# Altium PCB Display_Control_UV.PcbDoc
Units mil, origin at the board's own origin, x right, y up, seen from the top; angles counter-clockwise.
Board outline 2283.46 x 1259.84 mil, 2 copper layers (Top Layer, Bottom Layer); 16 components, 31 nets, 93 pads, 20 vias.
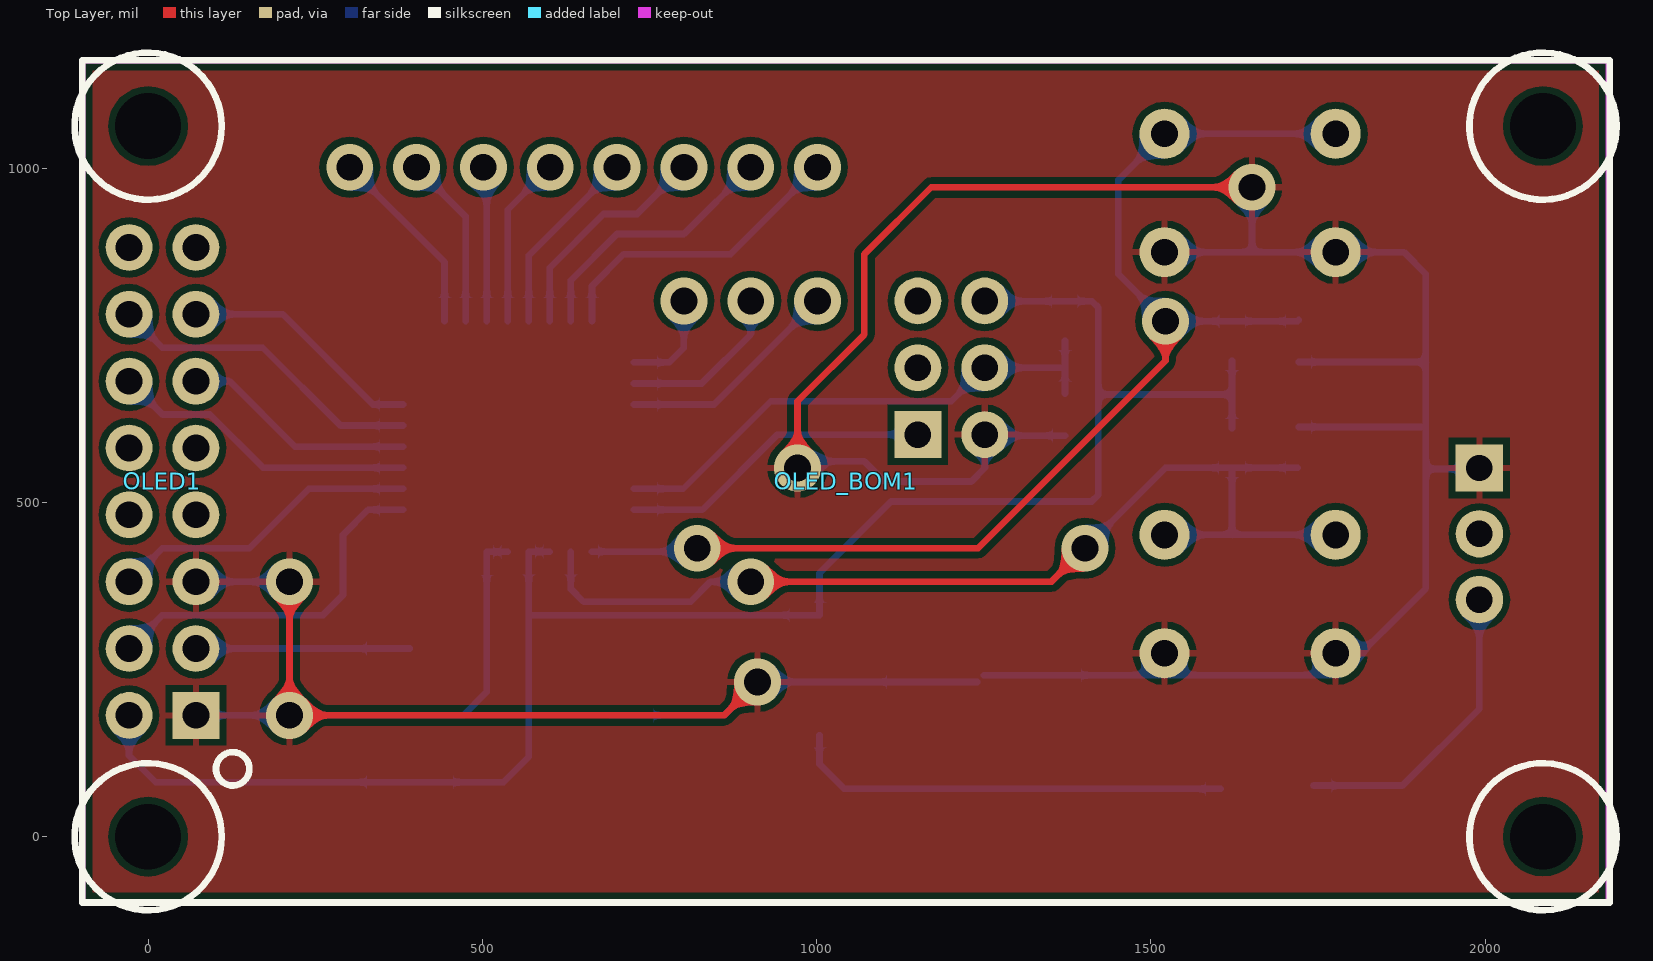
[diagram p0: Top Layer view]
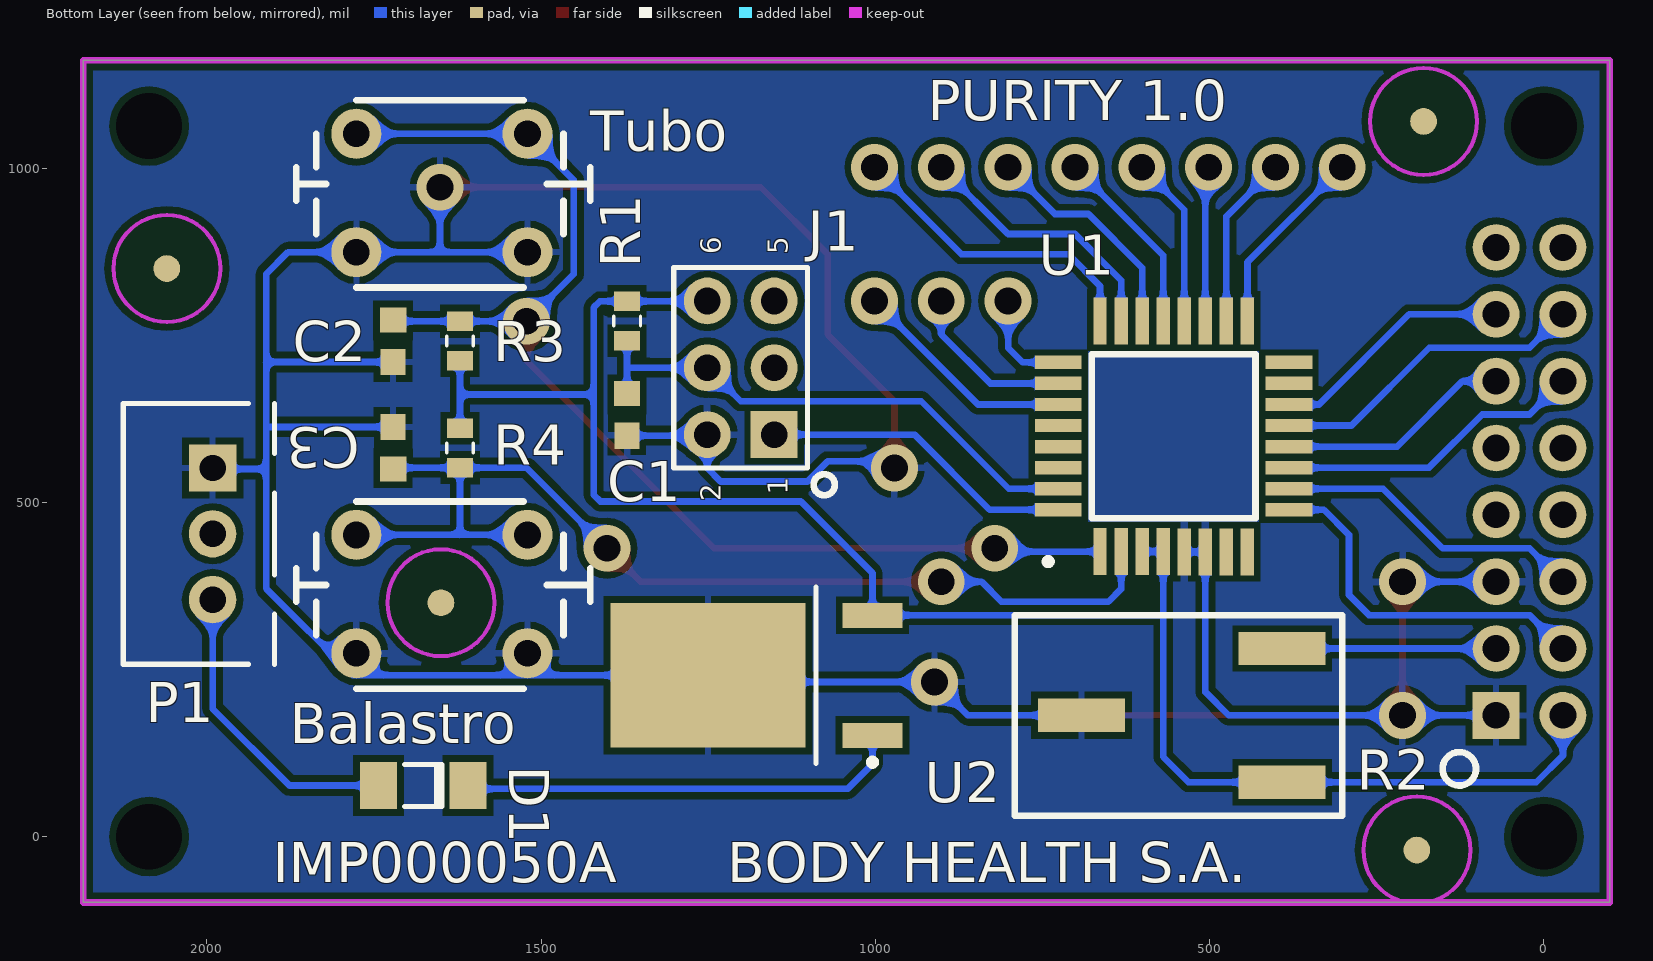
[diagram p1: Bottom Layer view, seen from below]

## Layer stack, top to bottom
Top Solder: solder mask 0.4, Solder Resist, Dk 3.5
Top Layer: signal copper 1.4
Dielectric 1: dielectric 12.6, FR-4, Dk 4.8
Bottom Layer: signal copper 1.4
Bottom Solder: solder mask 0.4, Solder Resist, Dk 3.5

## Board outline
-98.43,-98.43 2185.04,-98.43 2185.04,1161.42 -98.43,1161.42

## Design rules (kind name [scope] priority, off if disabled: settings)
Clearance [All] p1: gap=10 ignorepadtopadclearanceinfootprint=FALSE except(0: Arc-Hole Track-Hole SMDPad-Hole THPad-Hole Via-Hole Fill-Hole Poly-Hole Region-Hole Text-Hole)
MinimumSolderMaskSliver [All] p1: minsoldermaskwidth=3
PolygonConnect [All] p1: connectstyle=Relief reliefconductorwidth=10 reliefentries=4 polygonreliefangle="90 Angle" airgapwidth=10
RoomDefinition Display_Control_UV [InComponentClass('Display_Control_UV')] p1: confinementstyle=ConfineIn formatcopy=TRUE lockcomponents=FALSE outline -2098.5,-3098.5 -98.5,-3098.5 -98.5,-2098.5 -2098.5,-2098.5
RoutingVias [All] p1: holewidth=40 width=70 viastyle="Through Hole" minholewidth=40 minwidth=70 maxholewidth=40 maxwidth=70
SilkToSilkClearance [All] p1: silktosilkclearance=5
SilkToSolderMaskClearance [IsPad] p1: minsilkscreentomaskgap=0 clearancetoexposedcopper=TRUE
SolderMaskExpansion [All] p1: expansion=4 istentingtop=FALSE
Width [All] p1: maxlimit=10 minlimit=10 preferedwidth=10
27 further rules are at their usual default settings.

## Components (designator, comment, footprint, x,y, rotation, side; value= is the part's Value field where it differs from the comment)
Balastro "Boton para placa" TactButton 1776.5,451.5 r180 bottom
C1 "100nF" C_0603 1371.5,631.5 r90 bottom
C2 "100nF" C_0603 1721.5,741.5 r90 bottom
C3 "100nF" C_0603 1721.5,581.5 r270 bottom
D1 "FDLL4148" SOD-80/MLL34 1676.5,76.5 r180 bottom
J1 "DBM" DBM 1151.5,601.5 r90 bottom
OLED1 "OLED-08x02-4soportes" OLED-ZOCALODOBLE -98.5,-98.5 r270 top
OLED_BOM1 "OLED-8x2-BOM" OLED-08X02-4SOPORTES -98.5,-98.5 r270 top
P1 "IN_VCC" B3B-XH-A_3D 1991.5,551.5 r270 bottom
R1 "10K" R_0603 1371.5,771.5 r90 bottom
R2 "5K" Preset_SMD 391.5,81.5 r90 bottom
R3 "10K" R_0603 1621.5,741.5 r270 bottom
R4 "10K" R_0603 1621.5,581.5 r90 bottom
Tubo "Boton para placa" TactButton 1776.5,1051.5 r180 bottom
U1 "MC9S08PA32AVLCR-32" QFP7x7 691.5,461.5 r90 bottom
U2 "MC78M05" TO-252AA_N 1181.5,241.5 r0 bottom

## Footprints (in the part's own frame and the unit in brackets; to place one, negate y for a bottom-side part, rotate by r counter-clockwise, add the part's x,y. Pads: shape width x height; smd on the part's side, far side on the other; paste and mask are expansions set on the pad)
B3B-XH-A_3D [mm] "CONN HEADER XH TOP 3POS 2.5MM"
  rect 1.8x1.8 hole 1: 1(0,0)
  round 1.8 hole 1: 2(2.5,0) 3(5,0)
  silkscreen extent -2.45,-3.4 7.45,2.35, body extent -2.45,-3.4 7.45,2.35, height 7
C_0603 [mm] "Chip Capacitor, Body 1.6x0.8mm, IPC Normal Density"
  rect 1x0.95 smd: 1(-0.8,0)
  rect 0.95x1 smd: 2(0.8,0)
  body extent -0.87,-0.43 0.88,0.44, height 1.02
DBM [mil] "Pines para el debuguer"
  rect 70x70 hole 40: 1(0,0)
  round 70 hole 40: 2(0,100) 3(100,0) 4(100,100) 5(200,0) 6(200,100)
  silkscreen extent -91,-91 250,150, body extent -50,-50 250,150, height 333
OLED-08X02-4SOPORTES [mil] "OLED de 8 caracteres x 2 lineas con zócalo y 4 soportes"
  round 0 hole 98.5: ""(-1161.5,2185.11) ""(-1161.5,98.5) ""(-98.5,2185.11) ""(-98.5,98.5)
  silkscreen extent -1271,-11 11,2295, body extent -1260,-15 0,2299, height 697
OLED-ZOCALODOBLE [mil] "Zocalo de doble linea para LCD. Paso 0.1"
  rect 70x70 hole 40: 1(-280,170)
  round 70 hole 40: 2(-280,70) 3(-380,170) 4(-380,70) 5(-480,170) 6(-480,70) 11(-780,170) 12(-780,70) 13(-880,170) 14(-880,70) ""(-980,70) ""(-980,170) ""(-680,70) ""(-680,170) ""(-580,70) ""(-580,170)
  silkscreen extent -225,200 -175,250, body extent -1028,21 -228,221, height 336
Preset_SMD [mil]
  rect 50x130 smd: 1(0,0) 2(200,0) 3(100,300)
  Top Overlay keep-out lines w10: -50,-90 250,-90 250,400 -50,400 -50,370 -50,-90
  silkscreen extent -50,-90 250,400, body extent -34,-28 230,308, height 177
QFP7x7 [mil] "QFP; 32 Leads; Body 7 x 7 mm; Pitch 0.8 mm"
  rect 70x20 smd: 1(-35,-27.56) 2(-35,-59.09) 3(-35,-90.59) 4(-35,-122.09) 5(-35.43,-153.54) 6(-35.43,-185.04) 7(-35.43,-216.54) 8(-35.43,-248.03) 17(310,-248.03) 18(310,-216.53) 19(310,-185.04) 20(310,-153.54) 21(310,-122.09) 22(310,-90.59) 23(310,-59.09) 24(310,-27.56)
  rect 20x70 smd: 9(27.6,-310) 10(59.09,-310) 11(90.59,-310) 12(122.09,-310) 13(153.58,-310) 14(185.08,-310) 15(216.58,-310) 16(248.07,-310) 25(248.07,35) 26(216.58,35) 27(185.08,35) 28(153.58,35) 29(122.09,35) 30(90.59,35) 31(59.09,35) 32(27.6,35)
  silkscreen extent -55,-260 260,55, body extent -43,-319 317,41, height 64
R_0603 [mm] "Chip Resistor; Body 1.6 x 0.85 mm (LxW typ)"
  rect 0.75x1 smd: 1(-0.75,0) 2(0.75,0)
  silkscreen extent -0.18,-0.51 0.18,0.51, body extent -0.85,-0.4 0.85,0.4, height 0.56
SOD-80/MLL34 [mm] "Metal Electrode Face (MELF) Diode; Body 3.5 x 1.7 mm (LxDia)"
  rect 1.4x1.8 smd: 1(-1.7,0) 2(1.7,0)
  silkscreen extent -0.7,-0.8 0.7,0.8, body extent -1.82,-0.8 1.88,0.8, height 1.6
TactButton [mil] "Boton tactil para colocar directo en la placa"
  round 75 hole 40: 1(0,0) 2(256,0) 3(0,-177) 4(256,-177)
  silkscreen extent -90,-230 350,50, body extent -22,-208 282,28, height 169
TO-252AA_N [mm] "D-PAK, 4-Leads, Body 6.1x6.5mm, Pitch 2.28mm, Lead Span 9.9mm, IPC Medium Density"
  rect 2.286x0.95 smd: 1(-4.5,2.28) 3(-4.5,-2.28)
  rect 7.4x5.5 smd: 2(1.75,0)
  silkscreen extent -4.62,-3.35 -2.35,3.43, body extent -5,-3.37 5.1,3.37, height 2.37

## Part data
Balastro Tubo: library part TactButton, "Ejemplo"
C1 C2 C3: library part C_100nF_0603, "CAP CER 0.1UF 50V X7R 0603"
D1: library part "Diode FDLL4148", "DIODE GEN PURP 100V 200MA LL34/SOD80/MINI MELF"
J1: "CONN HEADER VERT 6POS 2.54MM"
OLED1: "Header para la placa 8x2 OLED Character Display"
OLED_BOM1: "8x2 OLED Character Display"
P1: library part JST_2.5_3, "CONN HEADER XH TOP 3POS 2.5MM"
R1 R3 R4: library part R_10k_0603, "RES SMD 10K OHM 5% 1/10W 0603"
R2: library part Preset_5k_SMD, "TRIMMER 5K OHM 0.5W GW TOP ADJ"
U1: "S08 Microcontroller IC 8-Bit 20MHz 32KB (32K x 8) FLASH 32-LQFP (7x7)"
U2: "IC REG LINEAR 5V 500MA DPAK"

## Free pads (board coordinates)
  round 40 smd far side paste-30 mask+20: 0(180,1070) 0(190,-20) 0(1650,350) 0(2060,850)

## Via types
v1: diameter 70, hole 40, Top Layer to Bottom Layer, 14 vias
v2: diameter 70, hole 40, Top Layer to Bottom Layer, tented both sides, 6 vias

## Nets (pads, with @x,y where several pads share a name; then routed paths per layer and width w, separated by ;. In a path a pad name is that pad's centre, name@x,y a point inside that pad or via, vN(x,y) a via of type N, cw(c..) or ccw(c..) an arc to the next point about the centre after c; other vN are vias at no path point)
5V: J1.6 OLED1.2 R1.2 R2.1 R3.2 R4.2 U1.3 U1.4 U2.3 | length 2747
  Bottom Layer w10: OLED1.2 -28.5,121.5 11.5,81.5 531.5,81.5 569.41,119.41 569.41,331.5 ; U1.3 U1.4 569.41,331.5 ; J1.6@1251.97,801.03 R1.2 1411.97,801.03 1421.5,791.5 1421.5,661.5 ; R4.2 1621.5,661.5 ; R3.2 1621.5,661.5 ; 569.41,331.5 569.65,331.27 U2.3 1004.34,394.34 1111.5,501.5 1411.5,501.5 1421.5,511.5 1421.5,661.5 ; 1421.5,661.5 1621.5,661.5
BKGD: J1.1 U1.32 | length 471.6
  Bottom Layer w10: U1.32 829.1,489.1 941.5,601.5 J1.1
DB4: OLED1.11 U1.12 | length 350.6
  Bottom Layer w10: OLED1.11 121.5,681.5 219.41,583.59 U1.12
DB5: OLED1.12 U1.11 | length 463.6
  Bottom Layer w10: OLED1.12 21.5,631.5 92.21,631.5 171.62,552.09 U1.11
DB6: OLED1.13 U1.14 | length 365.9
  Bottom Layer w10: OLED1.13 201.5,781.5 336.42,646.58 U1.14
DB7: OLED1.14 U1.13 | length 478.9
  Bottom Layer w10: OLED1.14 21.5,731.5 171.5,731.5 287.92,615.09 U1.13
E: OLED1.6 U1.10 | length 467.6
  Bottom Layer w10: OLED1.6 21.5,431.5 151.5,431.5 240.6,520.6 U1.10
GND: Balastro.3 Balastro.4 C1.1 C2.1 C3.1 J1.2 OLED1.1 OLED1.5 P1.1 R2.3 Tubo.3 Tubo.4 U1.5 U1.6 U2.2 | length 5920.7
  Top Layer w10: v1(211.5,381.5) v1(211.5,181.5) 861.5,181.5 v1(911.5,231.5) ; v2(971.5,551.5) 971.5,651.5 1071.5,751.5 1071.5,871.5 1171.5,971.5 v2(1651.5,971.5)
  Bottom Layer w10: OLED1.1 v1(211.5,181.5) 471.5,181.5 506.46,216.46 U1.6 U1.5 ; OLED1.5 v1(211.5,381.5) ; R2.3 861.5,181.5 v1(911.5,231.5) U2.2@1240.4,231.5 ; v2(971.5,551.5) 981.5,561.5 1071.5,561.5 1101.5,531.5 1231.5,531.5 1251.5,551.5 J1.2 ; U2.2 1781.5,241.5 1911.5,371.5 1911.5,550.01 ; J1.2@1253,600.01 C1.1 ; Tubo.4 1651.5,874.5 ; v2(1651.5,971.5) 1651.5,874.5 ; C3.1 1910.01,613 ; C2.1 1911.5,710.01 ; P1.1@1990.01,550.01 1911.5,550.01 ; 1651.5,874.5 Tubo.3 1878.5,874.5 1911.5,841.5 1911.5,710.01 ; 1911.5,550.01 1911.5,710.01
NetBalastro_1: Balastro.1 Balastro.2 C3.2 R4.1 U1.2 | length 1590.5
  Top Layer w10: v2(901.5,381.5) 1351.5,381.5 v2(1401.5,431.5)
  Bottom Layer w10: U1.2 632.41,370.6 651.5,351.5 811.5,351.5 841.5,381.5 v2(901.5,381.5) ; v2(1401.5,431.5) 1521.97,551.97 R4.1 ; Balastro.2 1621.5,451.5 ; C3.2@1719.53,551.97 R4.1 ; Balastro.1 1621.5,451.5 ; 1621.5,451.5 R4.1
NetC1_2: C1.2 J1.4 R1.1 U1.31 | length 797.9
  Bottom Layer w10: U1.31 800.6,520.6 931.5,651.5 1201.5,651.5 J1.4 1370.52,701.5 ; C1.2 R1.1
NetC2_2: C2.2 R3.1 Tubo.1 Tubo.2 U1.1 | length 1829.9
  Top Layer w10: v2(821.5,431.5) 1241.5,431.5 1521.97,711.97 v2(1521.97,771.03)
  Bottom Layer w10: U1.1 816.5,426.5 v2(821.5,431.5) ; C2.2 1719.53,771.03 R3.1 v2(1521.97,771.03) 1451.5,841.5 1451.5,982.5 Tubo.2 Tubo.1
NetD1_1: D1.1 P1.3 | length 458.9
  Bottom Layer w10: D1.1 1876.5,76.5 1991.5,191.5 P1.3
NetD1_2: D1.2 U2.1 | length 658.7
  Bottom Layer w10: U2.1 1004.34,108.67 1041.5,71.5 D1.2@1604.57,71.5
NetOLED1_3: OLED1.3 R2.2 | length 320
  Bottom Layer w10: OLED1.3 R2.2
RS: OLED1.4 U1.9 | length 548.7
  Bottom Layer w10: OLED1.4 21.5,331.5 261.5,331.5 291.5,361.5 291.5,451.5 329.1,489.1 U1.9
TP1: U1.26 | length 255.4
  Bottom Layer w10: U1.26 828.08,678.08 901.5,751.5 v1(901.5,801.5)
TP2: U1.25 | length 154.1
  Bottom Layer w10: U1.25 779.57,709.57 801.5,731.5 v1(801.5,801.5)
TP3: U1.24 | length 463.5
  Bottom Layer w10: U1.24 663.94,823.94 711.5,871.5 871.5,871.5 v1(1001.5,1001.5)
TP4: U1.23 | length 400
  Bottom Layer w10: U1.23 632.41,832.41 701.5,901.5 801.5,901.5 v1(901.5,1001.5)
TP5: U1.20 | length 256.3
  Bottom Layer w10: U1.20 537.96,937.96 v1(601.5,1001.5)
TP6: U1.19 | length 232.1
  Bottom Layer w10: v1(501.5,1001.5) 506.46,996.54 U1.19
TP7: U1.18 | length 260.4
  Bottom Layer w10: v1(401.5,1001.5) 474.97,928.04 U1.18
TP8: U1.17 | length 288.8
  Bottom Layer w10: v1(301.5,1001.5) 443.47,859.53 U1.17
TP9: U1.16
TP10: U1.15
TP11: U1.30
TP12: U1.29
TP13: U1.28
TP14: U1.27 | length 339.2
  Bottom Layer w10: U1.27 846.58,646.58 v1(1001.5,801.5)
TP17: U1.22 | length 342.4
  Bottom Layer w10: U1.22 600.91,850.91 681.5,931.5 731.5,931.5 v1(801.5,1001.5)
TP18: U1.21 | length 284.7
  Bottom Layer w10: U1.21 569.41,869.41 v1(701.5,1001.5)
pads on no net: J1.3 J1.5 OLED1. OLED_BOM1. P1.2 U1.7 U1.8

## Polygon pours and split planes (outlines as drawn)
GND on Top Layer "Top Layer - GND" (solid, remove dead copper, pour order 6): -98.5,-98.5 2186.5,-98.5 2186.5,1161.5 -98.5,1161.5
GND on Bottom Layer "Bottom Layer - GND" (solid, remove dead copper, pour order 8): -98.5,-98.5 2186.5,-98.5 2186.5,1161.5 -98.5,1161.5

## Keep-outs
Bottom Layer:
  circle w6: c1650,350 r80
  circle w6: c190,-20 r80
  circle w6: c2060,850 r80
  circle w6: c180,1070 r80
Keep-Out Layer:
  the board outline again, w10

## Silkscreen, mask and mechanical layers (free items; w line width, h text height)
Bottom Overlay:
  text "PURITY 1.0" at 921.5,1071.5 h60
  text "BODY HEALTH S.A." at 1221.5,-68.5 h60
  text "IMP000050A" at 1901.5,-68.5 h60

## Dimensions
-98.43,-98.43 to -98.43,1161.42 on Mechanical 1
-98.43,-98.43 to 2185.04,-98.43 on Mechanical 1

## Text inside footprints (layer, text, board x,y; h text height)
J1: Bottom Overlay "6" at 1231.5,871.5 h30 r270; Bottom Overlay "5" at 1131.5,871.5 h30 r270; Bottom Overlay "2" at 1231.5,501.5 h30 r270; Bottom Overlay "1" at 1131.5,511.5 h30 r270